# EAGLE board plantbot (EAGLE 9.7.0)
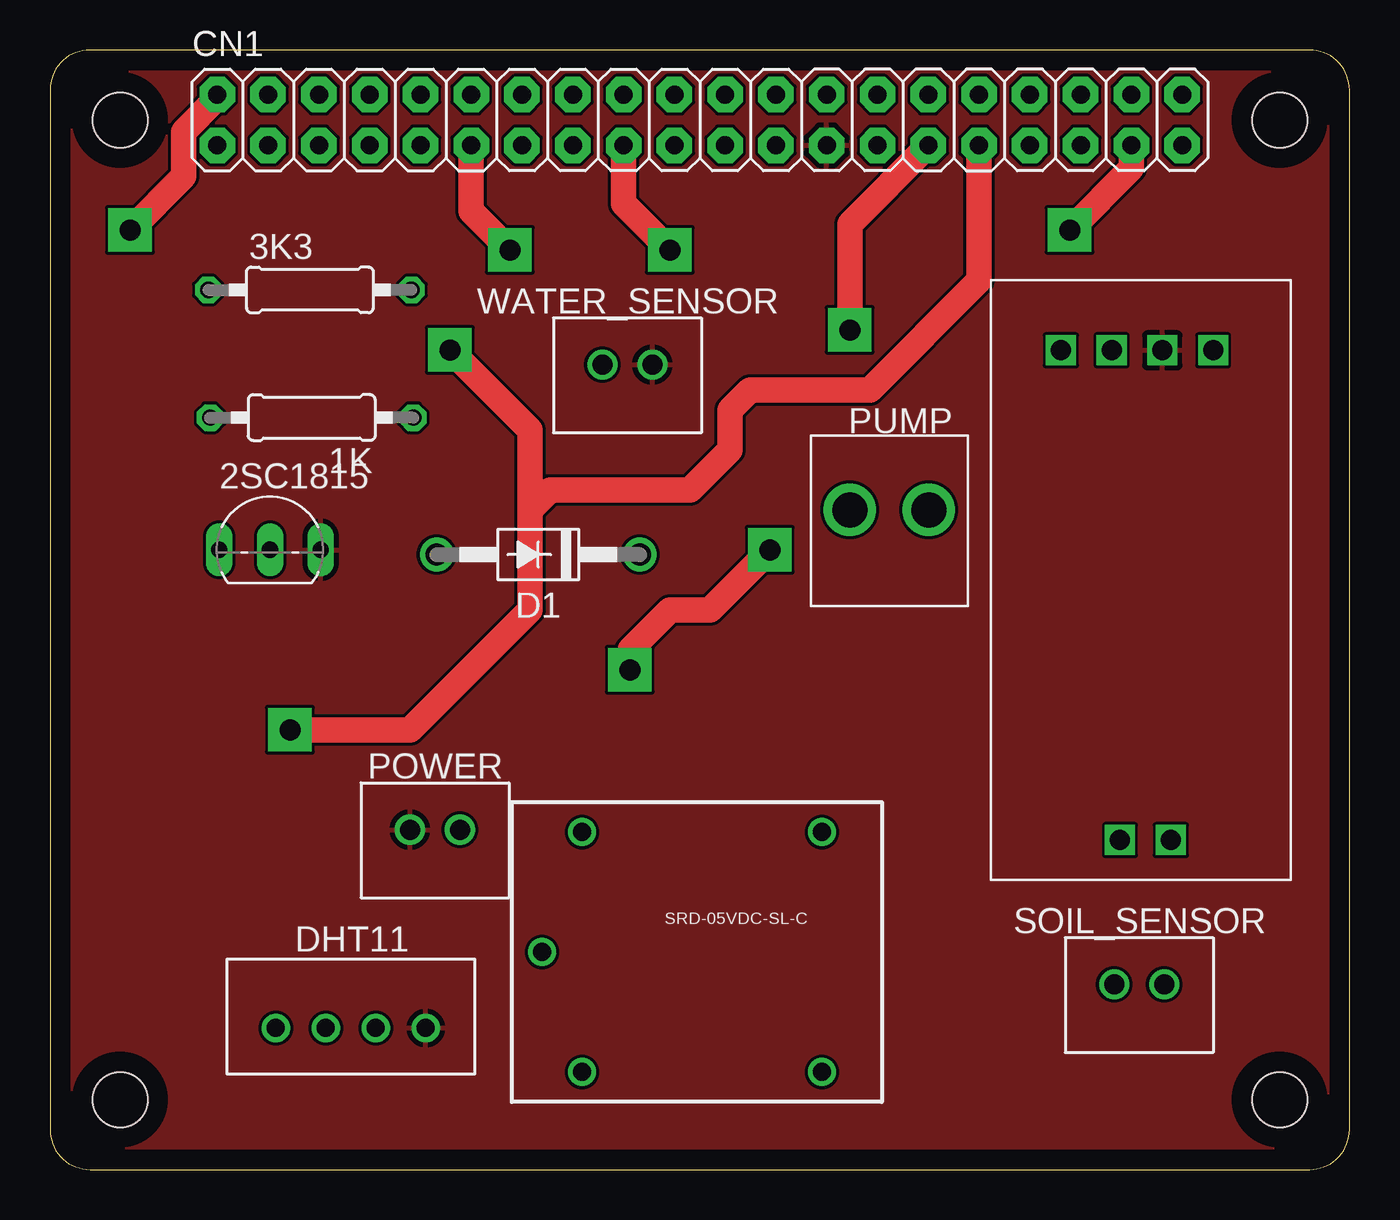
[diagram p0: board, top side]
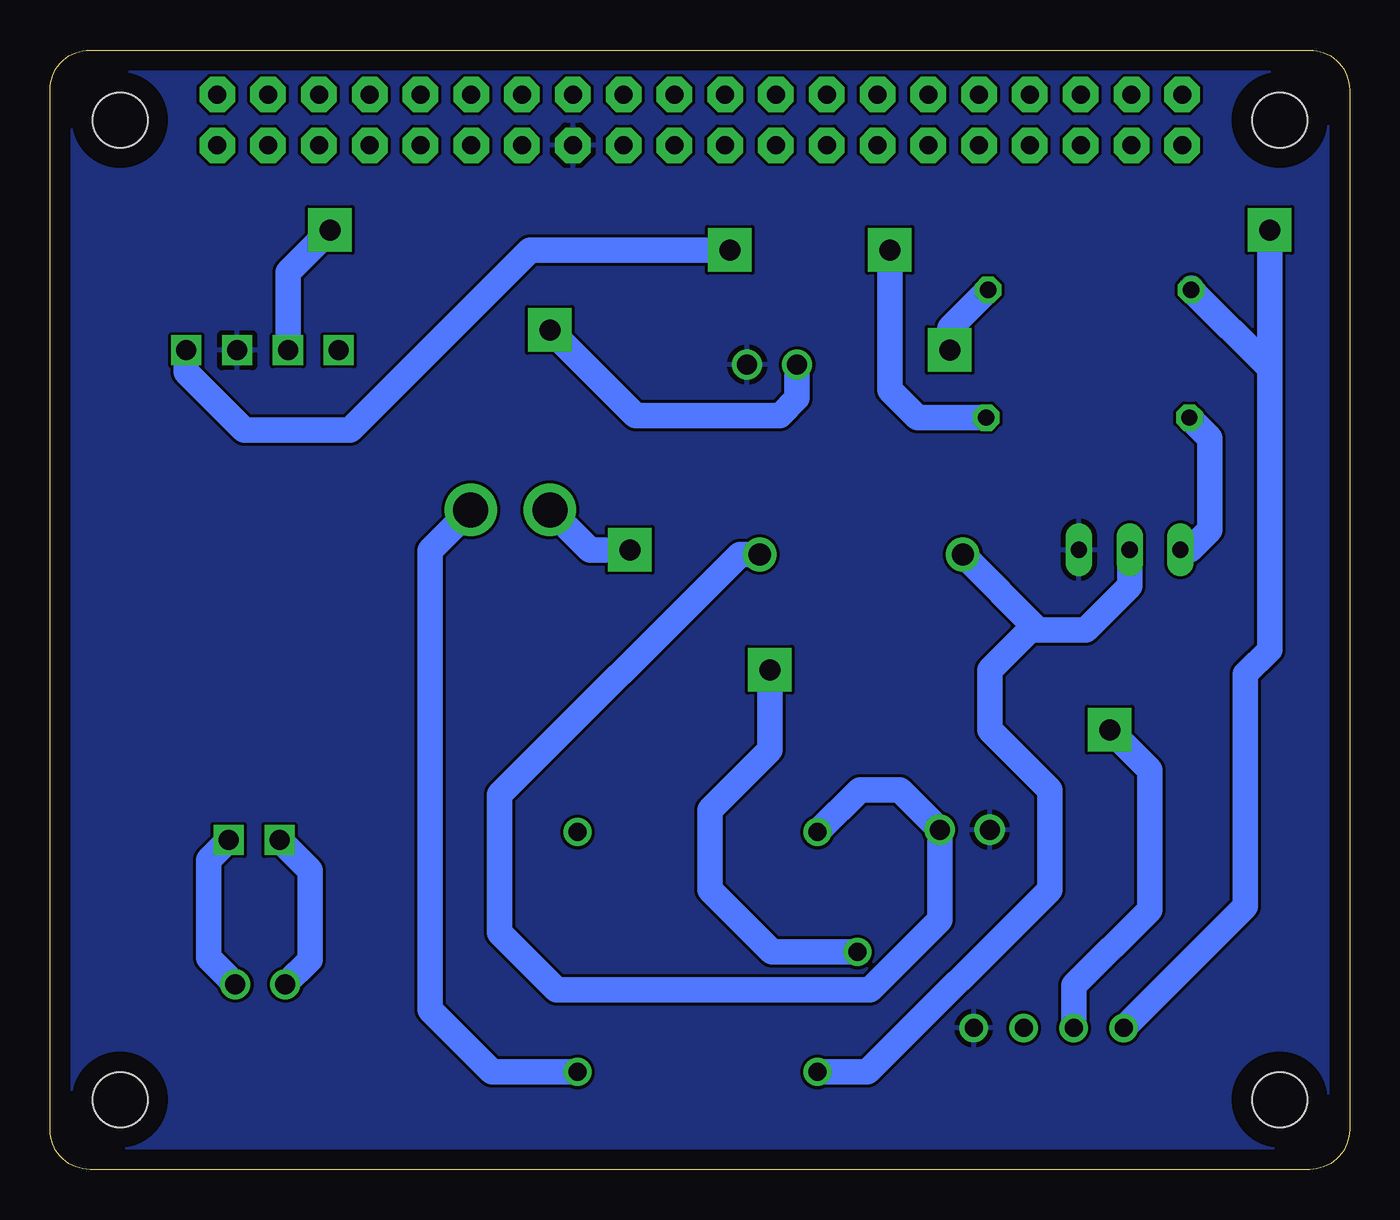
[diagram p1: board, bottom side, seen from below]

Size 65 x 56 mm. Coordinates in mm from the lower left corner, seen from the top.
Outline: 0,54 0,2 arc90 2,0 63,0 arc90 65,2 65,54 arc90 63,56 2,56 arc90 0,54
Copper layers (1*16): Top 0.035mm / dielectric 1.5mm / Bottom 0.035mm
Design rules "Fusion Electronics Design Rules": minimum track width 6mil, minimum drill 0.35mm, track to track 6mil, track to pad 6mil, pad to pad 6mil, via to via 6mil, smd to smd 6mil, copper to edge 40mil, drill to drill 6mil, minimum pad ring 10mil, minimum via ring 8mil, stop-mask expansion 4mil, vias tented up to drill 9999mil, thermal gap 10mil
Holes 2.75 mm at 3.5,52.5 61.5,3.5 61.5,52.5 3.5,3.5
Holes 0.35 mm at 75,66 -10,-10

## Footprints (pad centres in the part's own frame; a part is rotated, then mirrored left to right if it is on the bottom)
0207/10 = drill 0.813 octagon: 1 -5.08,0; 2 5.08,0
TO92-BCE = drill 0.813 long: B -2.54,0; C 0,0; E 2.54,0
2X20-BOLD = drill 0.9 pad 1.778 octagon: 1 -24.13,-1.27; 2 -24.13,1.27; 3 -21.59,-1.27; 4 -21.59,1.27; 5 -19.05,-1.27; 6 -19.05,1.27; 7 -16.51,-1.27; 8 -16.51,1.27; 9 -13.97,-1.27; 10 -13.97,1.27; 11 -11.43,-1.27; 12 -11.43,1.27; 13 -8.89,-1.27; 14 -8.89,1.27; 15 -6.35,-1.27; 16 -6.35,1.27; 17 -3.81,-1.27; 18 -3.81,1.27; 19 -1.27,-1.27; 20 -1.27,1.27; 21 1.27,-1.27; 22 1.27,1.27; 23 3.81,-1.27; 24 3.81,1.27; 25 6.35,-1.27; 26 6.35,1.27; 27 8.89,-1.27; 28 8.89,1.27; 29 11.43,-1.27; 30 11.43,1.27; 31 13.97,-1.27; 32 13.97,1.27; 33 16.51,-1.27; 34 16.51,1.27; 35 19.05,-1.27; 36 19.05,1.27; 37 21.59,-1.27; 38 21.59,1.27; 39 24.13,-1.27; 40 24.13,1.27
DO41-10 = drill 1.118: A 5.08,0; C -5.08,0
B4B-XH-A = drill 0.9: 1 0,0; 2 2.5,0; 3 5,0; 4 7.5,0
B2B-XH-A = drill 1: 1 0,0; 2 2.5,0
B2P-VH_396-2N = drill 1.75: 1 0,0; 2 3.96,0
SRD-05VDC-SL-C = drill 0.9: COIL0 -5.39,-6.12; COIL1 -5.39,5.88; SWCLOSED 6.61,5.88; SWCOMMON -7.39,-0.12; SWOPEN 6.61,-6.12
YL-38 = drill 1 square: AO 11.5,-26.5; DO 8.96,-26.5; GND 6.42,-26.5; P$1 6,-2; P$2 8.54,-2; VCC 3.88,-26.5

## Placement (x,y rotation side)
1K  [0207/10]  13.09,37.61 180 top
2SC1815  I-06477_2SC1815  [TO92-BCE]  11,31 0 top
3K3  [0207/10]  13,44 0 top
CN1  RASPBERRYPI-GPIO  [2X20-BOLD]  32.5,52.5 0 top
D1  DIODE_1N4004_DO41-10  [DO41-10]  24.42,30.76 180 top
DHT11  B4B-XH-A  [B4B-XH-A]  11.3,7.08 0 top
POWER  B2B-XH-A  [B2B-XH-A]  18,17 0 top
PUMP  B2P-VH  [B2P-VH_396-2N]  40,33 0 top
SOIL_SENSOR  B2B-XH-A  [B2B-XH-A]  53.23,9.26 0 top
SRD-05VDC-SL-C  RELAYPTH  [SRD-05VDC-SL-C]  32,11 0 top
WATER_SENSOR  B2B-XH-A  [B2B-XH-A]  27.63,40.26 0 top
YL38  YL-38YL-38  [YL-38]  62.06,14.48 180 top

## Library data of the parts
1K 3K3 = rcl; SPICEPREFIX: R
2SC1815 = Akizuki
CN1 = GPIO
D1 = Diode; CATEGORY: Diode; DATASHEET: https://www.onsemi.com/pdf/datasheet/1n4001-d.pdfv; DESCRIPTION: Diode 400 V 1A Through Hole DO-41; FORWARD_CURRENT: 1 A; FORWARD_VOLTAGE: 1.1 V; MANUFACTURER: onsemi; MPN: 1N4004; OPERATING_TEMPERATURE: -55°C ~ 175°C; PACKAGE_SIZE: DO-41; PACKAGE_TYPE: Through Hole; PART_STATUS: Obsolete; REVERSE_VOLTAGE: NA; ROHS: Compliant; SERIES: 1N4004; SUBCATEGORY: Rectifiers; TYPE: Single Diodes; ZENER_VOLTAGE: NA
DHT11 = Connector; CATEGORY: Connectors; DATASHEET: https://www.jst-mfg.com/product/pdf/eng/eXH.pdf; DESCRIPTION: Connector Header Through Hole 4 position 0.098" (2.50mm); MANUFACTURER: JST Sales America Inc.; MPN: B4B-XH-A; OPERATING_TEMPERATURE: -25°C ~ 85°C; PACKAGE_SIZE: NA; PACKAGE_TYPE: Through Hole; PART_STATUS: Active; PITCH: 0.098" (2.50mm); ROHS: Compliant; SERIES: XH; SUBCATEGORY: Rectangular Connectors; TYPE: Male Headers
POWER SOIL_SENSOR WATER_SENSOR = Connector; CATEGORY: Connectors; DATASHEET: https://www.jst-mfg.com/product/pdf/eng/eXH.pdf; DESCRIPTION: Connector Header Through Hole 2 position 0.098" (2.50mm); MANUFACTURER: JST Sales America Inc.; MPN: B2B-XH-A; OPERATING_TEMPERATURE: -25°C ~ 85°C; PACKAGE_SIZE: NA; PACKAGE_TYPE: Through Hole; PART_STATUS: Active; PITCH: 0.098" (2.50mm); ROHS: Compliant; SERIES: XH; SUBCATEGORY: Rectangular Connectors; TYPE: Male Headers
PUMP = Connector; CATEGORY: Connectors; DATASHEET: https://www.jst-mfg.com/product/pdf/eng/eVH.pdf; DESCRIPTION: Connector Header Through Hole 3 position 0.156" (3.96mm); MANUFACTURER: JST Sales America Inc.; MPN: B2P-VH; OPERATING_TEMPERATURE: -25°C ~ 85°C; PACKAGE_SIZE: NA; PACKAGE_TYPE: Through Hole; PART_STATUS: Active; PITCH: 0.156" (3.96mm); ROHS: Compliant; SERIES: VH; SUBCATEGORY: Rectangular Connectors; TYPE: Male Headers
SRD-05VDC-SL-C = SRD-05VDC-SL-C
YL38 = YL-38

## Nets
3V3: CN1.17 YL38.VCC
GND: 2SC1815.E CN1.25 DHT11.4 POWER.1 WATER_SENSOR.2 YL38.GND
N$1: 1K.2 2SC1815.B
N$2: 3K3.1 CN1.2 DHT11.1
N$3: 2SC1815.C D1.A SRD-05VDC-SL-C.COIL0
N$4: D1.C POWER.2 SRD-05VDC-SL-C.COIL1
N$5: 3K3.2 CN1.31 DHT11.2
N$6: PUMP.1 SRD-05VDC-SL-C.SWCOMMON
N$7: PUMP.2 SRD-05VDC-SL-C.SWOPEN
N$9: CN1.37 YL38.DO
N$12: CN1.29 WATER_SENSOR.1
N$13: 1K.1 CN1.11
N$14: SOIL_SENSOR.1 YL38.P$2
N$15: SOIL_SENSOR.2 YL38.P$1

## Tracks (layer width: path | path; a pad name or v marks a point on that pad's centre or on a via)
3V3  (via drill 1.05 pad 2.18)
  Top 1.27: CN1.17 28.69,48.31 v31,46
  Bottom 1.27: v31,46 41,46 50,37 55.28,37 58.18,39.9 YL38.VCC
GND
  pour Bottom: -4.92,-1.92 70.92,-1.92 70.92,61.92 -4.92,61.92
  pour Top: -7.92,-4.92 71.92,-4.92 71.92,63.92 -7.92,63.92
N$1
  Bottom 1.27: 1K.2 7,36.6 7,32 8,31 2SC1815.B
N$2  (via drill 1.05 pad 2.18)
  Top 1.27: CN1.2 8.37,53.6 6.69,51.92 6.69,49.69 v4,47
  Bottom 1.27: 7.92,44.08 3K3.1 4,40.08 | 4,40.08 4,26 5.22,24.78 5.22,13.16 DHT11.1 | v4,47 4,40.08
N$3
  Bottom 1.27: 15.58,27 14,27 13.19,27 11,29.19 2SC1815.C | 15.58,27 D1.A | SRD-05VDC-SL-C.COIL0 24.12,4.88 15,14 15,19 18,22 18,25 16,27 15.58,27
N$4
  Bottom 1.27: D1.C 30.5,30.76 42.51,18.75 42.51,11.84 39.67,9 25.01,9 24,9 20.5,12.5 POWER.2 22.5,19 24.49,19 SRD-05VDC-SL-C.COIL1
N$5  (via drill 1.05 pad 2.18)
  Top 1.27: v20,41 24,37 24,33 | 24,33 24,28 18,22 v12,22 | CN1.31 46.47,44.47 41,39 35,39 34,38 34,36 32,34 25,34 24,33
  Bottom 1.27: 3K3.2 20,42.08 v20,41 | v12,22 10,20 10,13 13.8,9.2 DHT11.2
N$6  (via drill 1.05 pad 2.18)
  Top 1.27: v36,31 33,28 31,28 29,26 v29,25
  Bottom 1.27: PUMP.1 38,31 v36,31 | v29,25 29,21 32,18 32,14 28.88,10.88 SRD-05VDC-SL-C.SWCOMMON
N$7
  Bottom 1.27: PUMP.2 46,30.96 46,8 42.88,4.88 SRD-05VDC-SL-C.SWOPEN
N$9  (via drill 1.05 pad 2.18)
  Top 1.27: CN1.37 54.09,50.09 v51,47
  Bottom 1.27: v51,47 53.1,44.9 YL38.DO
N$12  (via drill 1.05 pad 2.18)
  Top 1.27: CN1.29 40,47.3 v40,42
  Bottom 1.27: WATER_SENSOR.1 27.63,38.58 28.49,37.72 35.72,37.72 v40,42
N$13  (via drill 1.05 pad 2.18)
  Top 1.27: CN1.11 21.07,47.93 v23,46
  Bottom 1.27: v23,46 23,39 21.61,37.61 1K.1
N$14
  Bottom 1.27: YL38.P$2 52,14.96 52,10.49 SOIL_SENSOR.1
N$15
  Bottom 1.27: YL38.P$1 57.06,15.48 57.06,10.59 SOIL_SENSOR.2